# Altium PCB lte-router_V3.PcbDoc (part 1 of 2)
Units mm, origin at the board's own origin, x right, y up, seen from the top; angles counter-clockwise.
Board outline 80 x 50 mm, 4 copper layers (Top Layer, Inner Layer 2, Inner Layer 3, Bottom Layer), stack 1.443 mm thick; 105 components, 103 nets, 432 pads, 350 vias.
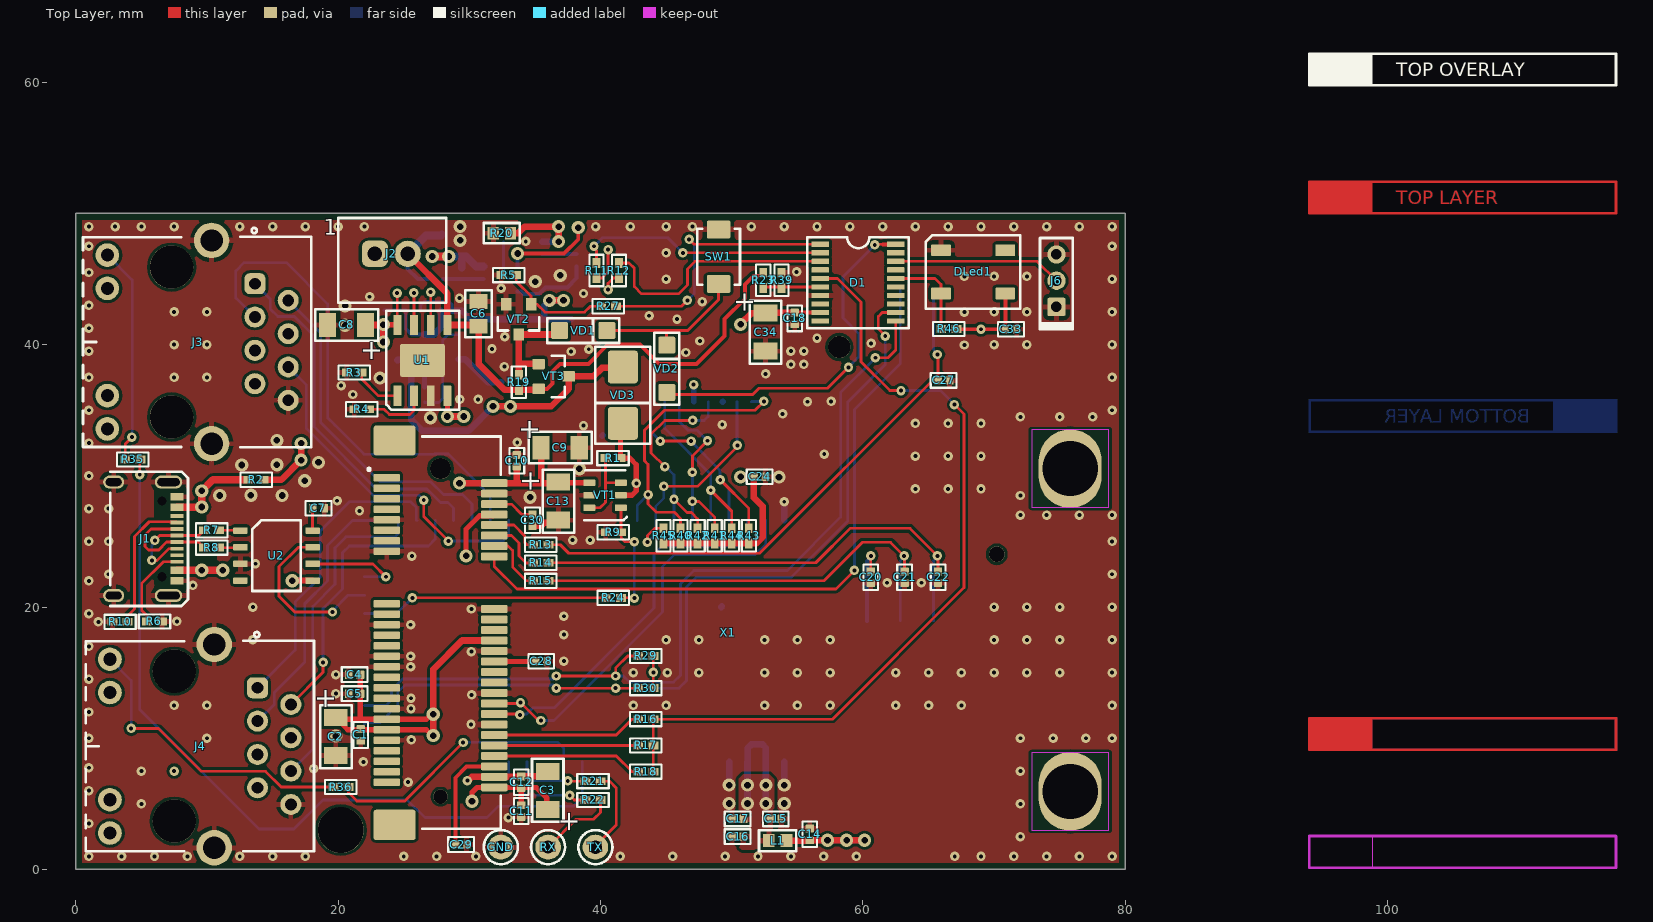
[diagram p0: Top Layer view]
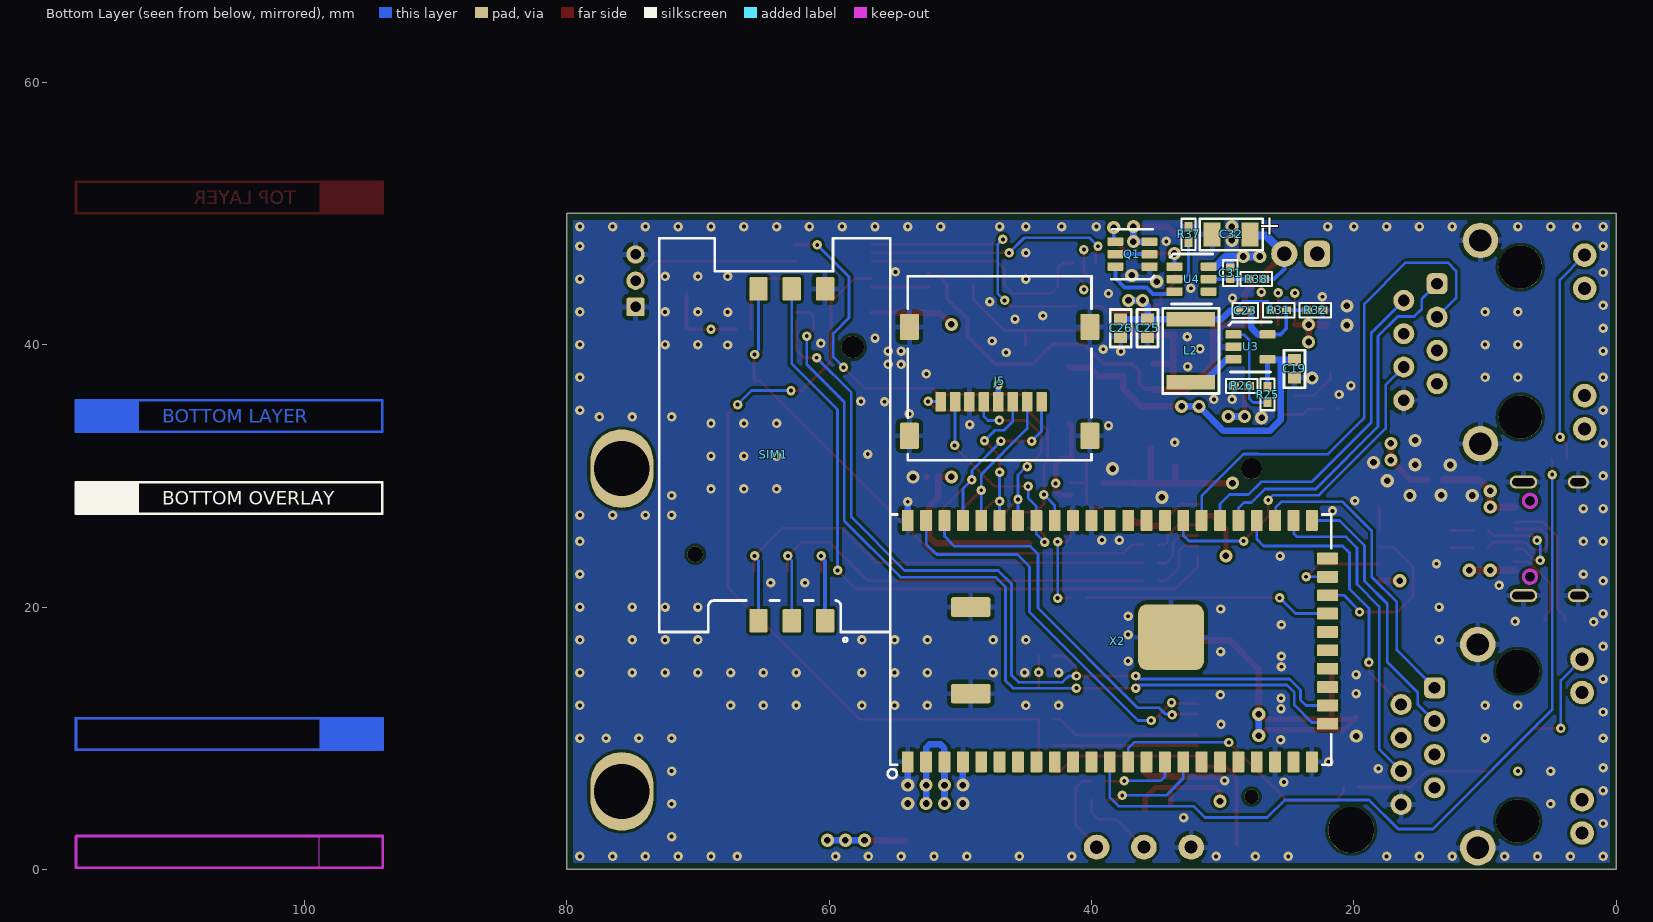
[diagram p1: Bottom Layer view, seen from below]
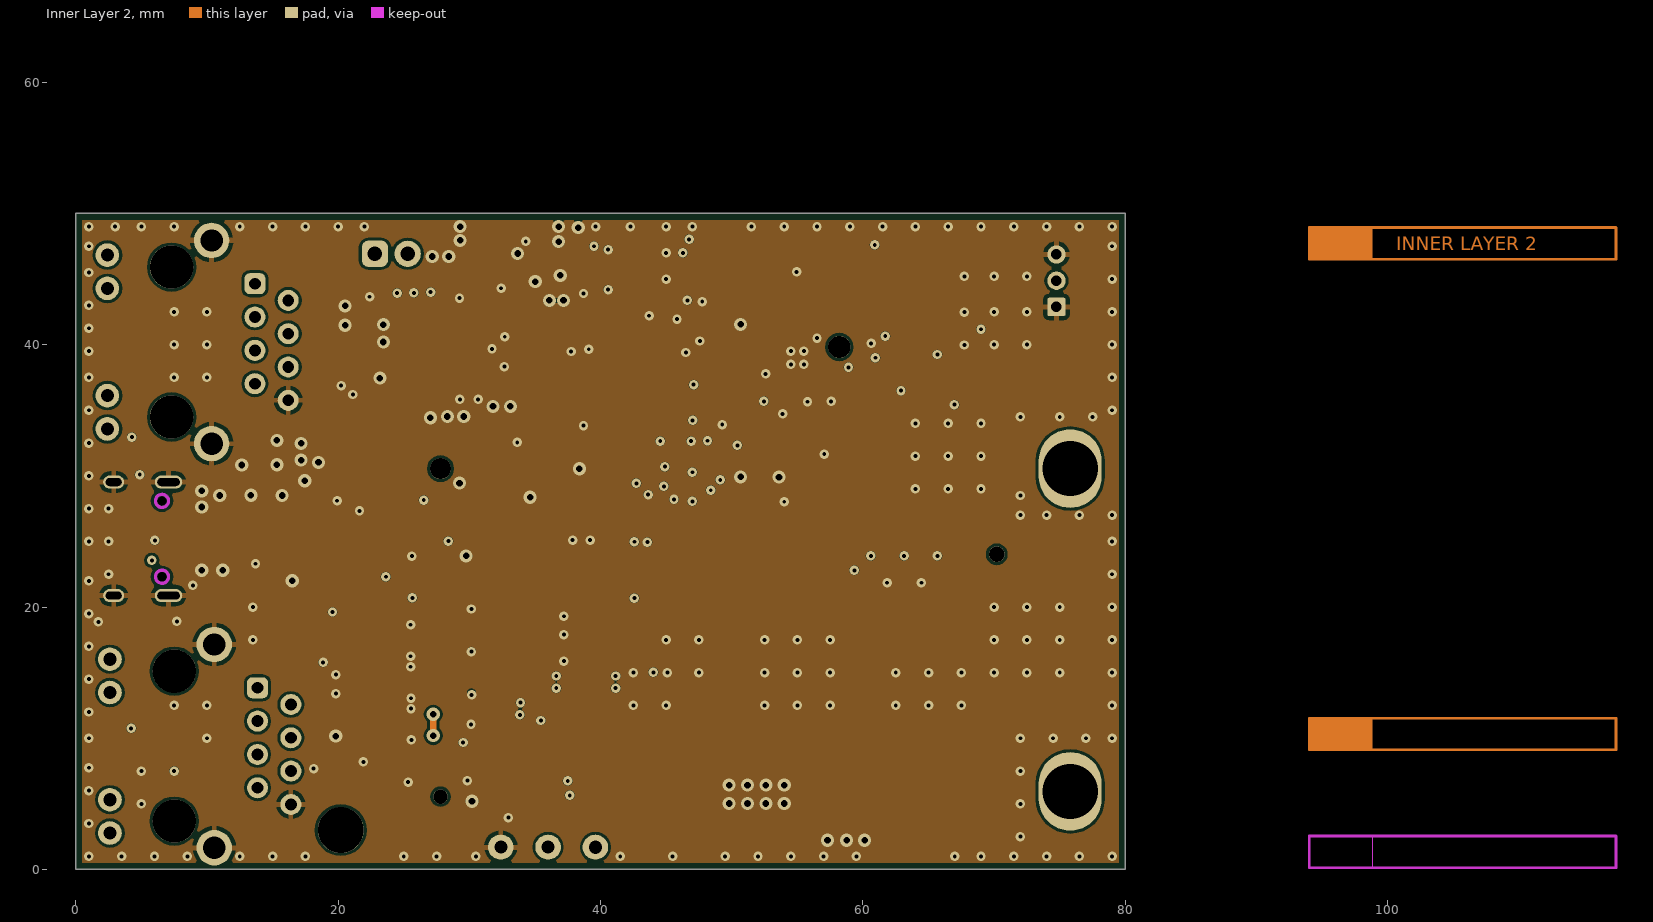
[diagram p2: Inner Layer 2]
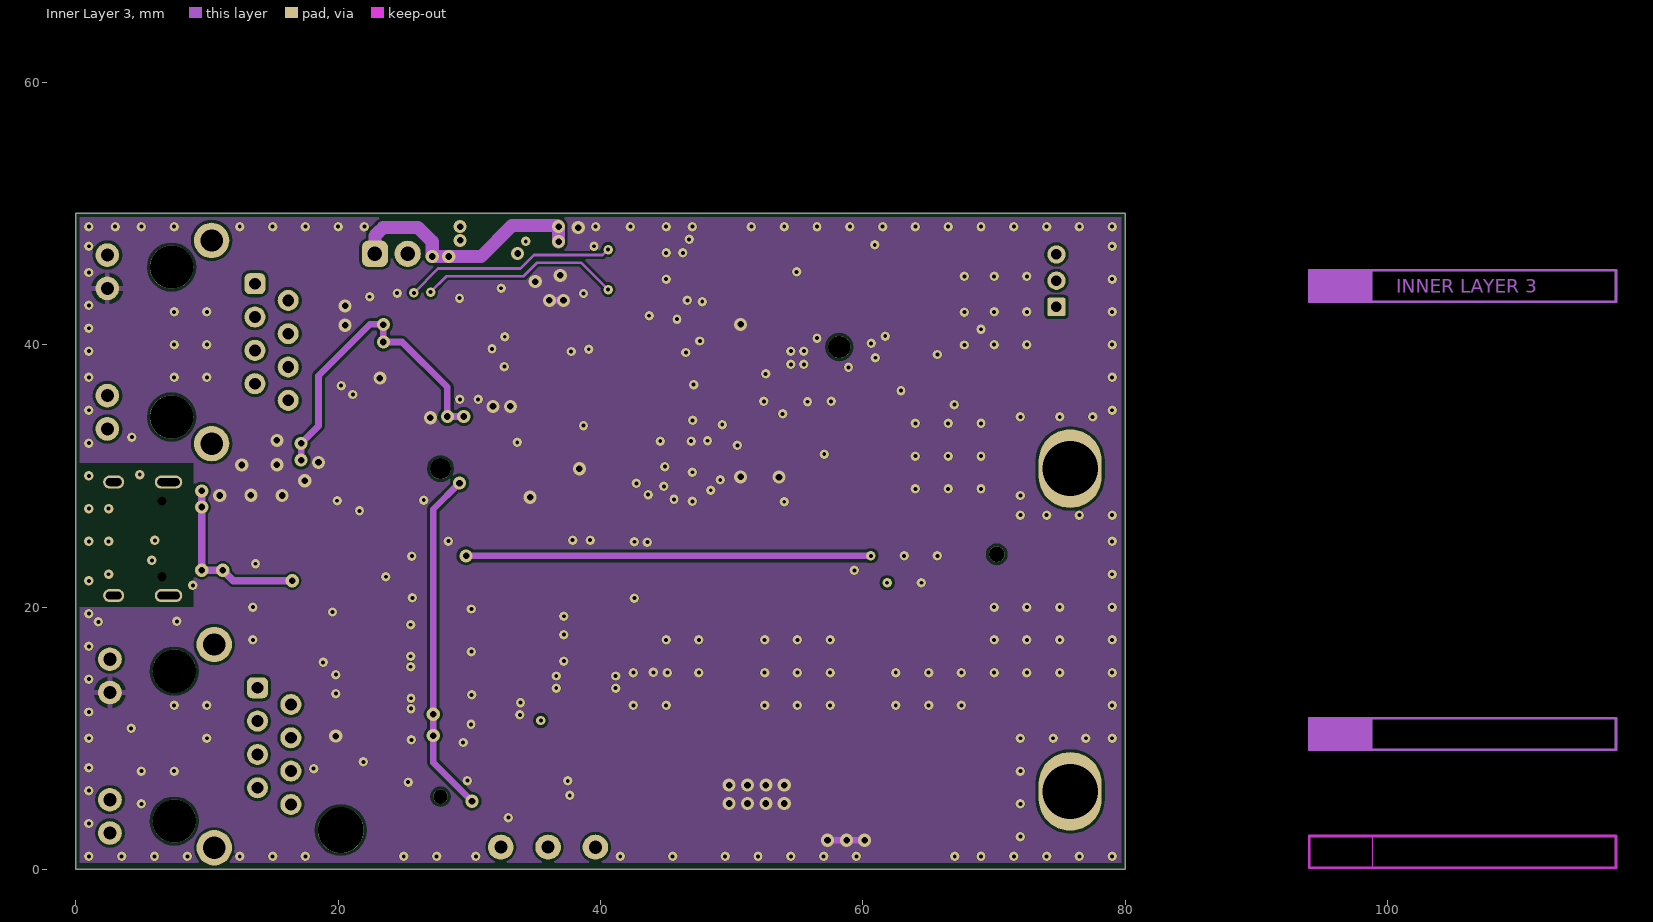
[diagram p3: Inner Layer 3]

## Layer stack, top to bottom
Top Solder: solder mask 0.0102, Solder Resist, Dk 3.5
Top Layer: signal copper 0.0356
Dielectric1: core 0.55, FR-4, Dk 4.2
Inner Layer 2: signal copper 0.036
Dielectric 4: prepreg 0.2, Dk 4.2
Inner Layer 3: signal copper 0.0356
Dielectric2: core 0.55, FR-4, Dk 4.2
Bottom Layer: signal copper 0.0356
Bottom Solder: solder mask 0.0102, Solder Resist, Dk 3.5

## Board outline
0,0 80,0 80,50 0,50

## Design rules (kind name [scope] priority, off if disabled: settings)
BoardOutlineClearance [not WithinRoom('Layers_Room')] p1: gap=0.3 ignorepadtopadclearanceinfootprint=FALSE
Clearance Pad_Via [IsVia vs IsPad] p1: gap=0.25 ignorepadtopadclearanceinfootprint=FALSE except(0: Arc-Hole Track-Hole SMDPad-Hole THPad-Hole Via-Hole Fill-Hole Poly-Hole Region-Hole Text-Hole)
Clearance MH [HasFootprint('HOLE3_D3.5_NM') vs not (OnLayer('Keep-Out Layer') or (InPadClass('Battery Pads')))] p2: gap=5.5 ignorepadtopadclearanceinfootprint=FALSE except(0: Arc-Hole Track-Hole SMDPad-Hole THPad-Hole Via-Hole Fill-Hole Poly-Hole Region-Hole Text-Hole)
Clearance "Keepout Layer" [(OnLayer('Keep-Out Layer')) and not WithinRoom('Room_sign')] p3 off: gap=2.2 ignorepadtopadclearanceinfootprint=FALSE except(0: Arc-Hole Track-Hole SMDPad-Hole THPad-Hole Via-Hole Fill-Hole Poly-Hole Region-Hole Text-Hole)
Clearance Clearance_Q8 [InComponent('Q8')] p4 off: gap=0.3 ignorepadtopadclearanceinfootprint=FALSE except(0: Arc-Hole Track-Hole SMDPad-Hole THPad-Hole Via-Hole Fill-Hole Poly-Hole Region-Hole Text-Hole)
Clearance MH_0.5MM [InPadClass('MH CLR 0.5') vs not (OnLayer('Keep-Out Layer'))] p5 off: gap=0.5 ignorepadtopadclearanceinfootprint=FALSE except(0: Arc-Hole Track-Hole SMDPad-Hole THPad-Hole Via-Hole Fill-Hole Poly-Hole Region-Hole Text-Hole)
Clearance SMD-->TH_Conn [InComponent('J1')] p6: gap=0 ignorepadtopadclearanceinfootprint=FALSE
Clearance SMD-->TH [IsSMTPin vs IsPadHoleValid] p7: gap=1 ignorepadtopadclearanceinfootprint=FALSE except(0: Arc-Hole Track-Hole SMDPad-Hole THPad-Hole Via-Hole Fill-Hole Poly-Hole Region-Hole Text-Hole)
Clearance DVC_A_Reinforced [InNetClass('DVC_A') or InNetClass('UT_1_Nets') or InNetClass('UT_2_Nets') or InNetClass('UT_3_Nets') or InNetClass('U_FS11_Nets') or InNetClass('U_FS12_Nets') or   InNetClass('U_PowerLV_Nets') or InNetClass('U_Esp32_Nets') vs not ( InNetClass('DVC_A') or InNetClass('UT_1_Nets') or InNetClass('UT_2_Nets') or InNetClass('UT_3_Nets') or InNetClass('U_FS11_Nets') or InNetClass('U_FS12_Nets') or   InNetClass('U_PowerLV_Nets')   or InNetClass('U_Esp32_Nets') or OnLayer('Keep-Out Layer') or InPadClass('Battery Pads'))] p8 off: gap=5.5 ignorepadtopadclearanceinfootprint=FALSE except(0: Arc-Hole Track-Hole SMDPad-Hole THPad-Hole Via-Hole Fill-Hole Poly-Hole Region-Hole Text-Hole)
Clearance Functional_600_1 [InNetClass('V614DC_1') vs not (( InNetClass('V614DC_1')  or InNetClass('T1_Hi') or HasFootprint('DPAK228P991X239-3N') )  or HasFootprint('TRANS ECO2425SLD'))] p9 off: gap=3.2 ignorepadtopadclearanceinfootprint=FALSE except(0: Arc-Hole Track-Hole SMDPad-Hole THPad-Hole Via-Hole Fill-Hole Poly-Hole Region-Hole Text-Hole)
Clearance FUNCTIOAL_250ac_L_1 [InNetClass('V220AC_L_1') vs not ( InNetClass('V220AC_L_1')   or InNetClass('J_NC') )] p10 off: gap=1 ignorepadtopadclearanceinfootprint=FALSE except(0: Arc-Hole Track-Hole SMDPad-Hole THPad-Hole Via-Hole Fill-Hole Poly-Hole Region-Hole Text-Hole)
Clearance [not WithinRoom('Layers_Room')] p11: gap=0.21 ignorepadtopadclearanceinfootprint=FALSE
ComponentClearance [not InComponent('GND') vs InComponent('X1')] p1: gap=0.8 collisioncheckmode=3 verticalgap=0.254 showdistances=FALSE
Height [All] p1: minheight=0 maxheight=35 prefheight=12.7
HoleSize [All] p1: absolutevalues=TRUE maxlimit=6 minlimit=0.3 maxpercent=80.000 minpercent=20.000
HoleToHoleClearance [All] p1: gap=0.45 allowstackedmicrovias=TRUE
MatchedLengths MatchedLengths_USB20 [InDifferentialPairClass('DP_20')] p1: tolerance=1.25 checknetsindiffpair=TRUE checkdiffpairvsdiffpair=FALSE checkxsignals=FALSE checkothers=FALSE usedelayunits=FALSE
MatchedLengths MatchedLengthsUSBSS [InDifferentialPairClass('DP_30')] p2: tolerance=0.12 checknetsindiffpair=TRUE checkdiffpairvsdiffpair=FALSE checkxsignals=FALSE checkothers=FALSE usedelayunits=FALSE
MinimumSolderMaskSliver [All] p1: minsoldermaskwidth=0.102
PolygonConnect PolygonConnect_Dirrect [InComponent('U1')] p1: connectstyle=Direct reliefconductorwidth=0.4 reliefentries=4 polygonreliefangle="90 Angle" airgapwidth=0.3
PolygonConnect [All] p2: thpad.connectstyle=Relief thpad.reliefconductorwidth=0.4 thpad.reliefentries=4 thpad.polygonreliefangle="90 Angle" thpad.airgapwidth=0.3 smdpad.connectstyle=Relief smdpad.reliefconductorwidth=0.4 smdpad.reliefentries=4 smdpad.polygonreliefangle="90 Angle" smdpad.airgapwidth=0.3 via.connectstyle=Direct via.reliefconductorwidth=0.4 via.reliefentries=4 via.polygonreliefangle="90 Angle" via.airgapwidth=0.3
RoomDefinition Layers_Room [False] p1: confinementstyle=ConfineIn formatcopy=TRUE lockcomponents=FALSE outline 87.85,70.65 123.75,70.65 123.75,-5.725 87.85,-5.725
RoutingVias [All] p1: holewidth=0.3 width=0.72 viastyle="Through Hole" minholewidth=0.3 minwidth=0.72 maxholewidth=0.8 maxwidth=1.5
SilkToSilkClearance [All] p1: silktosilkclearance=0
SilkToSolderMaskClearance SilkToSolderMaskClearance_0402 [IsPad] p1: minsilkscreentomaskgap=0.16 clearancetoexposedcopper=TRUE
SilkToSolderMaskClearance [IsPad] p2: minsilkscreentomaskgap=0.2 clearancetoexposedcopper=TRUE
SolderMaskExpansion SolderMaskExpansion_Via_NoMask [IsVia] p1: expansion=-5
SolderMaskExpansion [All] p2: expansion=0.025
UnRoutedNet [All] p1: checkbadconnections=TRUE
Width [not WithinRoom('Layers_Room')] p1: maxlimit=5 minlimit=0.21 preferedwidth=0.4
22 further rules are at their usual default settings.

## Components (designator, comment, footprint, x,y, rotation, side; value= is the part's Value field where it differs from the comment)
C1 "Cap1" C_0402 21.725,10.25 r270 top value=10nF
C2 "CapPOL1" TANT_CAP_A 19.825,10.125 r270 top value=10uF
C3 "CapPOL1" TANT_CAP_A 35.975,6.025 r90 top value=10uF
C4 "Cap1" C_0402 21.25,14.85 r0 top value=10pF
C5 "Cap1" C_0402 21.25,13.4 r0 top value=10pF
C6 "Cap1" C_0805 30.7,42.35 r90 top value=10uF
C7 "Cap1" C_0402 18.5,27.525 r0 top value=100nF
C8 "CapPOL1" TANT_CAP_A 20.65,41.5 r180 top value=10uF
C9 "CapPOL1" TANT_CAP_A 36.925,32.15 r0 top value=10uF
C10 "Cap1" C_0402 33.625,31.15 r270 top value=10nF
C11 "Cap1" C_0402 33.95,4.45 r90 top value=10pF
C12 "Cap1" C_0402 33.95,6.65 r270 top value=10pF
C13 "CapPOL1" TANT_CAP_A 36.79,28.07 r270 top value=10uF
C14 "Cap1" C_0402 55.95,2.675 r270 top value=10uF
C15 "Cap1" C_0402 53.35,3.85 r180 top value=10uF
C16 "Cap1" C_0402 50.45,2.5 r0 top value=10nF
C17 "Cap1" C_0402 50.45,3.85 r0 top value=10nF
C18 "Cap1" C_0402 54.8,42 r270 top value=100nF
C19 "Cap1" C_0603 24.525,38.15 r90 bottom value=2.2uF
C20 "Cap1" C_0402 60.6,22.275 r90 top value=10pF
C21 "Cap1" C_0402 63.175,22.275 r90 top value=10pF
C22 "Cap1" C_0402 65.725,22.275 r90 top value=10pF
C23 "Cap1" C_0402 28.275,42.6 r0 bottom value=47pF
C24 "Cap1" C_0402 52.125,29.925 r180 top value=10nF
C25 "Cap1" C_0603 35.725,41.25 r90 bottom value=2.2uF
C26 "Cap1" C_0603 37.775,41.25 r90 bottom value=2.2uF
C27 "Cap1" C_0402 66.15,37.275 r180 top value=10pF
C28 "Cap1" C_0402 35.48,15.87 r180 top value=100nF
C29 "Cap1" C_0402 29.37,1.9 r0 top value=100nF
C30 "Cap1" C_0402 34.81,26.62 r270 top value=100nF
C31 "Cap1" C_0402 29.425,45.45 r270 bottom value=100nF
C32 "CapPOL1" TANT_CAP_A 29.35,48.4 r0 bottom value=10uF
C33 "Cap1" C_0402 71.285,41.175 r180 top value=100nF
C34 "CapPOL1" TANT_CAP_A 52.575,40.95 r270 top value=10uF
D1 "CH32V003F4P6_1" TSSOP20 59.625,44.725 r270 top value=CH32V003F4P6
DLed1 "D_RGB_LED1" SMD5050 68.4,45.55 r180 top value=WS2812B-B/W
GND "GND" KP_c2_h1#1 32.4,1.7 r0 top value=KP_c2_h1
J1 "USB-TYPE-C-12pin_1" USB-31CW04-01(R)N 5.3,25.2 r90 top value=TYPE-C-31-M-12
J2 "Conn2" B2B-XH-A 24.05,46.925 r180 top value=B2B-XH-A
J3 "HR911105A_1" HR911105A 9.3,40.2 r90 top locked value=HR911105A
J4 "HR911105A_1" HR911105A 9.5,9.4 r90 top locked value=HR911105A
J5 "SD-CARD-12pin_1" TF-014-H16 47,37.2 r180 bottom value=TF-014-H16
J6 "Conn3" PBS2-3 74.75,44.875 r90 top value=PBS2-3
L1 "Inductor1" L_0603 53.5,2.2 r180 top value=BLM18
L2 "Inductor1" SMD4x4 32.425,39.525 r90 bottom value=1.5uH
Q1 "FS8205A_1" SOT-23-6 36.875,46.9 r0 bottom value=8205
R1 "Res1" R_0402 40.95,31.35 r0 top value=10K
R2 "Res1" R_0402 13.75,29.7 r0 top value=0R
R3 "Res1" R_0402 21.225,37.875 r0 top value=0R
R4 "Res1" R_0402 21.8,35.075 r0 top value=1K5
R5 "Res1" R_0402 33,45.3 r0 top value=100K
R6 "Res1" R_0402 6,18.9 r180 top value=5K1
R7 "Res1" R_0402 10.35,25.85 r180 top value=22R
R8 "Res1" R_0402 10.35,24.525 r180 top value=22R
R9 "Res1" R_0402 40.975,25.7 r180 top value=10K
R10 "Res1" R_0402 3.375,18.875 r180 top value=5K1
R11 "Res1" R_0402 39.7,45.65 r90 top value=47R
R12 "Res1" R_0402 41.4,45.65 r90 top value=47R
R13 "Res1" R_0402 35.45,24.75 r0 top value=47R
R14 "Res1" R_0402 35.45,23.375 r0 top value=47R
R15 "Res1" R_0402 35.45,22 r0 top value=47R
R16 "Res1" R_0402 43.45,11.45 r0 top value=47R
R17 "Res1" R_0402 43.45,9.45 r0 top value=47R
R18 "Res1" R_0402 43.45,7.45 r0 top value=47R
R19 "Res1" R_0402 33.775,37.125 r270 top value=100K
R20 "Res1" R_0603 32.475,48.5 r0 top value=0R
R21 "Res1" R_0402 39.425,6.725 r180 top value=0R
R22 "Res1" R_0402 39.425,5.3 r180 top value=0R
R23 "Res1" R_0402 52.4,44.9 r90 top value=470K
R24 "Res1" R_0402 40.975,20.7 r180 top value=0R
R25 "Res1" R_0402 26.575,36.2 r90 bottom value=100K
R26 "Res1" R_0402 28.55,36.85 r180 bottom value=100K
R27 "Res1" R_0402 40.6,42.925 r0 top value=4K7
R29 "Res1" R_0402 43.45,16.275 r180 top value=4K7
R30 "Res1" R_0402 43.45,13.815 r180 top value=4K7
R31 "Res1" R_0402 25.725,42.62 r0 bottom value=453K
R32 "Res1" R_0402 22.95,42.62 r0 bottom value=100K
R35 "Res1" R_0402 4.35,31.25 r0 top value=330R
R36 "Res1" R_0402 20.21,6.28 r0 top value=330R
R37 "Res1" R_0402 32.6,48.4 r270 bottom value=1K
R38 "Res1" R_0402 27.425,45 r180 bottom value=100R
R39 "Res1" R_0402 53.8,44.9 r270 top value=470K
R40 "Res1" R_0402 46.1,25.425 r270 top value=10K
R41 "Res1" R_0402 48.7,25.425 r270 top value=10K
R42 "Res1" R_0402 47.4,25.425 r270 top value=10K
R43 "Res1" R_0402 51.3,25.425 r270 top value=10K
R44 "Res1" R_0402 50,25.425 r270 top value=10K
R45 "Res1" R_0402 44.8,25.425 r270 top value=10K
R46 "Res1" R_0402 66.55,41.2 r0 top value=4K7
RX "RX" KP_c2_h1#1 36,1.7 r0 top value=KP_c2_h1
SIM1 "7111S2015X02LF" 7111S2015X02LF 64.2,31.6 r0 bottom
SW1 "SW1" TS1088AR02016 49,46.7 r270 top value=TS-1088
TX "TX" KP_c2_h1#2 39.609,1.7 r0 top value=KP_c2_h1
U1 "TP4056_1" ESOP-8 26.425,38.8 r90 top value=TP4056
U2 "CH340N_1" SOP-8 15.3,23.925 r0 top value=CH340N
U3 "SY8089_1" SOT-23-5 27.875,39.825 r180 bottom value=SY8089A
U4 "DW01A_2" SOT-23-6 32.37,45 r180 bottom value=DW01A
VD1 "D_Shottky1" SOD123 38.675,41.075 r180 top value=PMEG3010
VD2 "D_Shottky1" SOD123 45.048,38.158 r270 top value=PMEG3010
VD3 "D_Shottky1" SMB 41.7,36.15 r90 top value=SS26
VT1 "P-CH_N-CH" SOT-23-6L 40.35,28.525 r180 top value=AP2003
VT2 "N-CH_1" SOT-23-3#1 33.75,41.925 r270 top value=BSS138
VT3 "P-CH_1" SOT-23-3#2 36.425,37.575 r0 top value=AP2301B
X1 "1775838-2_1" 17758382 27.8,30.55 r270 top value=1775838-2
X2 "HLK-7688A_1" 7688A 38,17.4 r0 bottom value=HLK-7688A

## Footprints (in the part's own frame and the unit in brackets; to place one, negate y for a bottom-side part, rotate by r counter-clockwise, add the part's x,y. Pads: shape width x height; smd on the part's side, far side on the other; paste and mask are expansions set on the pad)
7111S2015X02LF [mm]
  rrect15% 1.4x1.8 smd: 1(-3.9,12.65) 2(-1.36,12.65) 3(1.18,12.65) 5(-3.9,-12.65) 6(-1.36,-12.65) 7(1.18,-12.65)
  round 1.2 hole 1.2 unplated: MH1(6,7.58)
  round 1.7 hole 1.7 unplated: MH2(-6,-8.22)
  silkscreen extent -8.86,-16.5 8.74,14.25, body extent -8.63,-16.22 8.57,13.28, height 2.59
7688A [mm]
  rrect15% 0.9x1.6 smd: 1(16,9.2) 2(14.6,9.2) 3(13.2,9.2) 4(11.8,9.2) 5(10.4,9.2) 6(9,9.2) 7(7.6,9.2) 8(6.2,9.2) 9(4.8,9.2) 10(3.4,9.2) 11(2,9.2) 12(0.6,9.2) 13(-0.8,9.2) 14(-2.2,9.2) 15(-3.6,9.2) 16(-5,9.2) 17(-6.4,9.2) 18(-7.8,9.2) 19(-9.2,9.2) 20(-10.6,9.2) 21(-12,9.2) 22(-13.4,9.2) 23(-14.8,9.2) 34(-14.8,-9.2) 35(-13.4,-9.2) 36(-12,-9.2) 37(-10.6,-9.2) 38(-9.2,-9.2) 39(-7.8,-9.2) 40(-6.4,-9.2) 41(-5,-9.2) 42(-3.6,-9.2) 43(-2.2,-9.2) 44(-0.8,-9.2) 45(0.6,-9.2) 46(2,-9.2) 47(3.4,-9.2) 48(4.8,-9.2) 49(6.2,-9.2) 50(7.6,-9.2) 51(9,-9.2) 52(10.4,-9.2) 53(11.8,-9.2) 54(13.2,-9.2) 55(14.6,-9.2) 56(16,-9.2)
  rrect15% 1.6x0.9 smd: 24(-16,6.3) 25(-16,4.9) 26(-16,3.5) 27(-16,2.1) 28(-16,0.7) 29(-16,-0.7) 30(-16,-2.1) 31(-16,-3.5) 32(-16,-4.9) 33(-16,-6.3)
  rrect20% 3x1.5 smd: 57(11.2,-2.6) 58(11.2,4)
  rrect25% 5x5 smd: 59(-4.066,-0.3)
  silkscreen extent -16.28,-9.65 17.52,10.45, body extent -16.11,-9.47 17.1,9.25, height 1.86
17758382 [mm]
  rrect25% 0.59x2 smd: 1(0.7,-4.1) 2(1.1,4.1) 3(1.5,-4.1) 4(1.9,4.1) 5(2.3,-4.1) 6(2.7,4.1) 7(3.1,-4.1) 8(3.5,4.1) 9(3.9,-4.1) 10(4.3,4.1) 11(4.7,-4.1) 12(5.1,4.1) 13(5.5,-4.1) 14(5.9,4.1) 15(6.3,-4.1) 16(6.7,4.1) 17(10.3,-4.1) 18(10.7,4.1) 19(11.1,-4.1) 20(11.5,4.1) 21(11.9,-4.1) 22(12.3,4.1) 23(12.7,-4.1) 24(13.1,4.1) 25(13.5,-4.1) 26(13.9,4.1) 27(14.3,-4.1) 28(14.7,4.1) 29(15.1,-4.1) 30(15.5,4.1) 31(15.9,-4.1) 32(16.3,4.1) 33(16.7,-4.1) 34(17.1,4.1) 35(17.5,-4.1) 36(17.9,4.1) 37(18.3,-4.1) 38(18.7,4.1) 39(19.1,-4.1) 40(19.5,4.1) 41(19.9,-4.1) 42(20.3,4.1) 43(20.7,-4.1) 44(21.1,4.1) 45(21.5,-4.1) 46(21.9,4.1) 47(22.3,-4.1) 48(22.7,4.1) 49(23.1,-4.1) 50(23.5,4.1) 51(23.9,-4.1) 52(24.3,4.1)
  rrect20% 2.3x3.2 smd: 53(-2.15,-3.5)
  rrect15% 2.3x3.2 smd: 54(27.15,-3.5)
  round 1.6 hole 1.6 unplated: 55(0,0)
  round 1.1 hole 1.1 unplated: 56(25,0)
  oval 6x4.8 hole 4.2: 57(0,48) 58(24.6,48)
  Top Layer keep-out region: -2.95,45.05 2.95,45.05 2.95,50.95 -2.95,50.95
  Top Layer keep-out region: 21.65,45.05 27.55,45.05 27.55,50.95 21.65,50.95
  silkscreen extent -2.45,-5.55 27.45,4.6, body extent -2.45,-4.79 27.45,4.29, height 5.68
B2B-XH-A [mm]
  rrect50% 2x2 hole 1.1 paste-2539.97 mask+0: 1(1.25,0)
  round 2 hole 1.1 paste-2539.97 mask+0: 2(-1.25,0)
  silkscreen extent -4.2,-2.73 4.05,3.72, body extent -3.77,-2.4 3.63,3.35, height 7
C_0402 [mm] "Chip Capacitor, 2-Leads, Body 1.02x0.51mm, IPC Medium Density"
  rrect15% 0.6x0.64 smd: 1(-0.44,0) 2(0.44,0)
  silkscreen extent -0.98,-0.56 0.98,0.56, body extent -0.5,-0.26 0.5,0.26, height 0.52
C_0603 [mm] "Chip Capacitor, 2-Leads, Body 1.60x0.80mm, IPC Medium Density"
  rect 0.9x1 smd: 1(-0.675,0) 2(0.675,0)
  silkscreen extent -1.43,-0.8 1.43,0.8, body extent -0.8,-0.41 0.8,0.41, height 0.82
C_0805 [mm] "Chip Capacitor, 2-Leads, Body 2.00x1.20mm, IPC Medium Density"
  rect 1.12x1.4 smd: 1(-0.94,0) 2(0.94,0)
  silkscreen extent -1.8,-1 1.8,1, body extent -1,-0.64 1,0.64, height 1.26
ESOP-8 [mm] "SOT23, 3-Leads, Body 2.90x2.40mm, Pitch 0.95mm, IPC Medium Density"
  rrect10% 1.55x0.6 smd: 1(-2.7,1.905) 2(-2.7,0.635) 3(-2.7,-0.635) 4(-2.7,-1.905) 5(2.7,-1.905) 6(2.7,-0.635) 7(2.7,0.635) 8(2.7,1.905)
  rrect10% 2.5x3.4 smd: 9(0,0)
  silkscreen extent -3.77,-2.8 3.77,2.75, body extent -3.1,-2.49 3.1,2.49, height 1.68
HR911105A [mm]
  rrect50% 1.6x1.6 hole 0.9: 1(4.445,-4.355)
  round 1.6 hole 0.9: 2(3.175,-6.895) 3(1.905,-4.355) 4(0.635,-6.895) 5(-0.635,-4.355) 6(-1.905,-6.895) 7(-3.175,-4.355) 8(-4.445,-6.895)
  round 1.8 hole 1: 9(6.625,6.895) 10(4.085,6.895) 11(-4.085,6.895) 12(-6.625,6.895)
  round 2.7 hole 1.7: MH1(7.745,-1.055) MH2(-7.745,-1.055)
  round 3.3 hole 3.3 unplated: MH3(5.715,1.995) MH4(-5.715,1.995)
  silkscreen extent -8.02,-8.65 8.7,8.75, body extent -7.93,-8.7 7.95,12.7, height 13.6
KP_c2_h1#1 [mm] "SOT23, 3-Leads, Body 2.90x2.40mm, Pitch 0.95mm, IPC Medium Density"
  oval 1.95x1.9 hole 1: 1(0,0)
  silkscreen extent -1.3,-1.3 1.3,1.3
KP_c2_h1#2 [mm] "SOT23, 3-Leads, Body 2.90x2.40mm, Pitch 0.95mm, IPC Medium Density"
  oval 1.95x1.9 hole 1: 1(0,-0.005)
  silkscreen extent -1.3,-1.3 1.3,1.3
L_0603 [mm] "Chip Inductor, 2-Leads, Body 1.60x0.80mm, IPC Medium Density"
  rect 0.9x1 smd: 1(-0.675,0) 2(0.675,0)
  silkscreen extent -1.43,-0.8 1.43,0.8, body extent -0.88,-0.47 0.88,0.47, height 0.94
PBS2-3 [mm]
  rrect20% 1.4x1.4 hole 0.8: 1(-2,0)
  round 1.4 hole 0.8: 2(0,0) 3(2,0)
  silkscreen extent -3.7,-1.25 3.25,1.25, body extent -3,-1 3,1, height 4.35
R_0402 [mm] "Chip Resistor, 2-Leads, Body 1.0x0.5mm, IPC Medium Density"
  rect 0.75x0.6 smd: 1(-0.575,0) 2(0.575,0)
  silkscreen extent -1.2,-0.54 1.2,0.54, body extent -0.5,-0.25 0.5,0.25, height 0.35
R_0603 [mm] "Chip Resistor, 2-Leads, Body 1.60x0.80mm, IPC Medium Density"
  rect 0.85x0.95 smd: 1(-0.65,0) 2(0.65,0)
  silkscreen extent -1.38,-0.77 1.38,0.77, body extent -0.8,-0.4 0.8,0.4, height 0.45
SMB [mm]
  rrect20% 2.5x2.3 smd: 1(-2.15,0) 2(2.15,0)
  silkscreen extent -3.7,-2.1 3.7,2.1, body extent -2.79,-1.97 2.79,1.97, height 2.49
SMD4x4 [mm]
  rect 1.1x3.7 smd: 1(-2.402,0) 2(2.402,0)
  silkscreen extent -3.25,-2.15 3.25,2.15, body extent -2.2,-2 2.2,2, height 1.8
SMD5050 [mm] "SOT23, 3-Leads, Body 2.90x2.40mm, Pitch 0.95mm, IPC Medium Density"
  rrect15% 1.5x0.9 smd: 1(-2.45,1.65) 2(-2.45,-1.65) 3(2.45,-1.65) 4(2.45,1.65)
  silkscreen extent -3.6,-2.8 3.6,2.8, body extent -2.7,-2.5 2.7,2.5, height 1.55
SOD123 [mm]
  rrect20% 1.3x1.3 smd: 1(-1.8,0) 2(1.8,0)
  silkscreen extent -2.75,-0.95 2.75,0.95, body extent -1.86,-0.77 1.86,0.78, height 1.35
SOP-8 [mm]
  rrect25% 1.1x0.5 smd: 1(-2.75,1.905) 2(-2.75,0.635) 3(-2.75,-0.635) 4(-2.75,-1.905) 5(2.75,-1.905) 6(2.75,-0.635) 7(2.75,0.635) 8(2.75,1.905)
  silkscreen extent -1.85,-2.7 1.85,2.7, body extent -3.11,-2.5 3.11,2.5, height 1.87
SOT-23-3#1 [mm] "SOT23, 3-Leads, Body 2.90x2.40mm, Pitch 0.95mm, IPC Medium Density"
  rect 0.95x0.8 smd: 1(-1.15,0.95) 2(-1.15,-0.95) 3(1.15,0)
  silkscreen extent -0.15,-1.58 0.85,1.58, body extent -1.41,-1.45 1.41,1.45, height 1.5
SOT-23-3#2 [mm] "SOT23, 3-Leads, Body 2.90x2.40mm, Pitch 0.95mm, IPC Medium Density"
  rrect15% 0.95x0.8 smd: 1(-1.15,0.95) 2(-1.15,-0.95) 3(1.15,0)
  silkscreen extent -0.15,-1.58 0.85,1.58, body extent -1.41,-1.45 1.41,1.45, height 1.5
SOT-23-5 [mm]
  rrect20% 1.2x0.65 smd: 1(-1.3,0.95) 2(-1.3,0) 3(-1.3,-0.95) 4(1.3,-0.95) 5(1.3,0.95)
  silkscreen extent -1.65,-1.91 1.6,1.91, body extent -1.5,-1.55 1.5,1.55, height 1.45
SOT-23-6 [mm]
  rrect20% 1.2x0.65 smd: 1(-1.3,0.95) 2(-1.3,0) 3(-1.3,-0.95) 4(1.3,-0.95) 5(1.3,0) 6(1.3,0.95)
  silkscreen extent -1.65,-1.91 1.6,1.91, body extent -1.4,-1.45 1.4,1.45, height 1.2
SOT-23-6L [mm]
  rrect20% 0.9x0.5 smd: 1(-1.2,0.95) 2(-1.2,0) 3(-1.2,-0.95) 4(1.2,-0.95) 5(1.2,0) 6(1.2,0.95)
  silkscreen extent -1.65,-1.91 1.6,1.91, body extent -1.37,-1.49 1.37,1.49, height 1.15
TANT_CAP_A [mm] "Chip Capacitor, 2-Leads, Body 3.25x1.60mm, IPC Medium Density"
  rect 1.3x1.8 smd: 1(-1.45,0) 2(1.45,0)
  silkscreen extent -2.4,-1.2 2.4,1.2, body extent -1.7,-0.8 1.7,0.8, height 1.85
TF-014-H16 [mm]
  rrect15% 0.8x1.5 smd: 1(3.2,-1.55) 2(2.1,-1.55) 3(1,-1.55) 4(-0.1,-1.55) 5(-1.2,-1.55) 6(-2.3,-1.55) 7(-3.4,-1.55) 8(-4.5,-1.55)
  rrect15% 1.45x2 smd: 9(-6.875,-4.15) 10(-6.875,4.15) 11(6.875,4.15) 12(6.875,-4.15)
  silkscreen extent -7,-6 7,8, body extent -6.82,-5.7 6.68,7.8, height 2
TS1088AR02016 [mm]
  rrect15% 1.35x1.8 smd: 1(-2.075,0) 2(2.075,0)
  silkscreen extent -2.13,-1.63 2.13,1.63, body extent -2.5,-1.5 2.5,1.5, height 1.93
TSSOP20 [mm]
  rrect20% 0.4x1.35 smd mask+0.05: 1(-2.925,-2.875) 2(-2.275,-2.875) 3(-1.625,-2.875) 4(-0.975,-2.875) 5(-0.325,-2.875) 6(0.325,-2.875) 7(0.975,-2.875) 8(1.625,-2.875) 9(2.275,-2.875) 10(2.925,-2.875) 11(2.925,2.875) 12(2.275,2.875) 13(1.625,2.875) 14(0.975,2.875) 15(0.325,2.875) 16(-0.325,2.875) 17(-0.975,2.875) 18(-1.625,2.875) 19(-2.275,2.875) 20(-2.925,2.875)
  silkscreen extent -3.47,-3.88 3.47,3.87, body extent -3.3,-3.3 3.3,3.3, height 1.2
USB-31CW04-01(R)N [mm]
  rect 0.59x1 smd: 1(3.2,-2.41) 2(2.4,-2.41) 11(-2.4,-2.41) 12(-3.2,-2.41)
  rect 0.29x1 smd: 3(1.75,-2.41) 4(1.25,-2.41) 5(0.75,-2.41) 6(0.25,-2.41) 7(-0.25,-2.41) 8(-0.75,-2.41) 9(-1.25,-2.41) 10(-1.75,-2.41)
  round 0.25 hole 0.7 unplated: CM(-2.89,-1.27) CM(2.89,-1.27)
  oval 1x2.1 hole 0.6 slot 1.7 at 90 deg: SH(-4.325,-1.77) SH(4.325,-1.77)
  oval 1x1.6 hole 0.6 slot 1.2 at 90 deg: SH(-4.325,2.41) SH(4.325,2.41)
  silkscreen extent -5.13,-3.25 5.13,2.68, body extent -4.48,-2.74 4.47,5.01, height 3.24

## Part data
C1 C10 C16 C17 C24: library part Cap_14, "CAP CER 10nF ±10% 50V X7R 0402", Manufacturer="Samsung Electro-Mechanics", Manufacturer Part Number=CL05B103KB5NNNC, Operating Temperature="-55°C ~ 125°C", Part Number="CAP 0402 X7R 10nF 50V", Supplier Part Number 1=1276-1028-1-ND, Date Of Revision=22-Nov-24, Item=Cap_14, Packaging="Cut Tape (CT)", Supplier 1=DiGiKey, Supplier 2=JLCPCB, Supplier 3=Kosmodrom, Supplier Part Number 2=C15195, Supplier Part Number 3=00-00073522, Supplier Unit Price 1=0.08, Supplier Unit Price 100=0.004, Type=SMD
C2 C3 C8 C9 C13 C32 C34: library part Cap_50, "CAP TANT 10UF 20% 10V 1206", Manufacturer="KYOCERA AVX", Manufacturer Part Number=TAJA106M010RNJ, Operating Temperature="-55°C ~ 125°C", Part Number="CAP TANT 10mkF 10V \"A\"", Supplier Part Number 1=478-1657-1-ND, Date Of Revision=05-Dec-24, Item=Cap_50, Packaging="Cut Tape (CT)", Supplier 1=DiGiKey, Supplier 2=JLCPCB, Supplier 3=IMRAD, Supplier Part Number 2=C92127, Supplier Part Number 3=369662, Supplier Unit Price 1=0.37, Supplier Unit Price 100=0.1386, Type=SMD
C4 C5 C11 C12 C20 C21 C22 C27: library part Cap_1, "CAP CER 10PF ±5% 50V C0G/NP0 0402", Manufacturer="Murata Electronics", Manufacturer Part Number=GRM1555C1H100JA01D, Operating Temperature="-55°C ~ 125°C", Part Number="CAP 0402 NP0 10pF 50V", Supplier Part Number 1=490-5921-1-ND, Date Of Revision=22-Nov-24, Item=Cap_1, Packaging="Cut Tape (CT)", Supplier 1=DiGiKey, Supplier 2=JLCPCB, Supplier 3=Kosmodrom, Supplier Part Number 2=C76946, Supplier Part Number 3=00-00034318, Supplier Unit Price 1=0.08, Supplier Unit Price 100=0.0072, Type=SMD
C6: library part Cap_41, "CAP CER 10UF ±10% 16V X7R 0805", Manufacturer="Samsung Electro-Mechanics", Manufacturer Part Number=CL21B106KOQNNNE, Operating Temperature="-55°C ~ 125°C", Part Number="CAP 0805 X7R 10mkF 16V", Supplier Part Number 1=1276-2872-1-ND, Date Of Revision=01-Aug-24, Item=Cap_41, Packaging="Cut Tape (CT)", Supplier 1=DiGiKey, Supplier 2=JLCPCB, Supplier 3=Kosmodrom, Supplier Part Number 2=C95841, Supplier Part Number 3=00-00073508, Supplier Unit Price 1=0.26, Supplier Unit Price 100=0.0841, Type=SMD
C7 C28 C29 C30 C31: library part Cap_18, "CAP CER 0.1UF ±10% 50V X7R 0402", Manufacturer="Murata Electronics", Manufacturer Part Number=GRM155R71H104KE14J, Operating Temperature="-55°C ~ 125°C", Part Number="CAP 0402 X7R 100nF 50V", Supplier Part Number 1=490-13342-1-ND, Date Of Revision=24-Nov-24, Item=Cap_18, Packaging="Cut Tape (CT)", Supplier 1=DiGiKey, Supplier 2=JLCPCB, Supplier 3=Kosmodrom, Supplier Part Number 2=C2649519, Supplier Part Number 3=00-00069281, Supplier Unit Price 1=0.08, Supplier Unit Price 100=0.0072, Type=SMD
C14 C15: library part Cap_28, "CAP CER 10UF ±10% 10V X6S 0603", Manufacturer="Murata Electronics", Manufacturer Part Number=GRM188C81A106KA73D, Operating Temperature="-55°C ~ 105°C", Part Number="CAP 0603 X6S 10mkF 10V", Supplier Part Number 1=490-GRM188C81A106KA73DCT-ND, Date Of Revision=22-Nov-24, Item=Cap_28, Packaging="Cut Tape (CT)", Supplier 1=DiGiKey, Supplier 2=JLCPCB, Supplier 3=Kosmodrom, Supplier Part Number 2=C385036, Supplier Part Number 3=00-00073533, Supplier Unit Price 1=0.26, Supplier Unit Price 100=0.0933, Type=SMD
C18 C33: library part Cap_24, "CAP CER 0.1UF ±10% 50V X7R 0402", Manufacturer="Murata Electronics", Manufacturer Part Number=GRM155R71H104KE14J, Operating Temperature="-55°C ~ 125°C", Part Number="CAP 0402 X7R 100nF 50V", Supplier Part Number 1=490-13342-1-ND, Date Of Revision=24-Nov-24, Item=Cap_24, Packaging="Cut Tape (CT)", Supplier 1=DiGiKey, Supplier 2=JLCPCB, Supplier 3=Kosmodrom, Supplier Part Number 2=C2649519, Supplier Part Number 3=00-00069281, Supplier Unit Price 1=0.08, Supplier Unit Price 100=0.0072, Type=SMD
C19 C25 C26: library part Cap_27, "CAP CER 2.2UF ±10% 10V X7R 0603", Manufacturer="Samsung Electro-Mechanics", Manufacturer Part Number=CL10B225KP8NNNC, Operating Temperature="-55°C ~ 125°C", Part Number="CAP 0603 X7R 2.2mkF 10V", Supplier Part Number 1=1276-1134-1-ND, Date Of Revision=19-May-24, Item=Cap_27, Packaging="Cut Tape (CT)", Supplier 1=DiGiKey, Supplier 2=JLCPCB, Supplier 3=Kosmodrom, Supplier Part Number 2=C100082, Supplier Part Number 3=00-00034462, Supplier Unit Price 1=0.1, Supplier Unit Price 100=0.0329, Type=SMD
C23: library part Cap_5, "CAP CER 47PF ±5%  50V C0G/NP0 0402", Manufacturer="Samsung Electro-Mechanics", Manufacturer Part Number=CL05C470JB5NNNC, Operating Temperature="-55°C ~ 125°C", Part Number="CAP 0402 C0G/NP0 47pF 50V", Supplier Part Number 1=1276-1699-1-ND, Date Of Revision=22-Nov-24, Item=Cap_5, Packaging="Cut Tape (CT)", Supplier 1=DiGiKey, Supplier 2=JLCPCB, Supplier 3=Kosmodrom, Supplier Part Number 2=C84706, Supplier Part Number 3=00-00034330, Supplier Unit Price 1=0.1, Supplier Unit Price 100=0.0086, Type=SMD
D1: library part Chip_18, "TSSOP-20-175mil  Microcontrollers (MCU/MPU/SOC) ROHS", Manufacturer="WCH(Jiangsu Qin Heng)", Manufacturer Part Number=CH32V003F4P6, Operating Temperature="-40°C ~ 85°C", Part Number="Analog STM8S003", Date Of Revision=14-Jan-25, Item=Chip_18, Supplier 1=DiGiKey, Supplier 2=JLCPCB, Supplier 3=Kosmodrom, Supplier Part Number 2=CH32V003F4P6, Supplier Part Number 3=00-, Type=SMD
DLed1: library part Led_4, "SMD5050 RGB LEDs(Built-in IC) ROHS", Manufacturer=Worldsemi, Manufacturer Part Number=WS2812B-B/W, Part Number="SMD5050 RGB LED 5x5mm", Date Of Revision=14-Jan-25, Item=Led_4, Supplier 1=DiGiKey, Supplier 2=JLCPCB, Supplier 3=Kosmodrom, Supplier Part Number 2=C114586, Supplier Part Number 3=00-, Type=SMD
GND RX TX: library part WC_1, "Kontrol Point c2.0mm_h1.0mm", Manufacturer Part Number=KP_c2_h1, Date Of Revision=02-May-24, Item=WC_1, Part Number=KP_c2_h1, Supplier 1=DiGiKey, Supplier 2=JLCPCB, Supplier 3=Kosmodrom, Supplier Part Number 3=00-, Type=Thru-hole
J1: library part Conn_38, "5A 1 16P Female Type-C SMD USB Connectors ROHS", Manufacturer="Korean Hroparts Elec", Manufacturer Part Number=TYPE-C-31-M-12, Operating Temperature="-30°C ~ 80°C", Part Number="Conneector USB-Type C 12pin", Date Of Revision=22-Nov-24, Item=Conn_38, Packaging="Cut Tape (CT)", Supplier 1=DiGiKey, Supplier 2=JLCPCB, Supplier 3=IMRAD, Supplier Part Number 2=C165948, Supplier Part Number 3=440808, Type=Thru-hole
J2: library part Conn_21, "CONN HEADER VERT 2POS 2.5MM", Manufacturer="JST Sales America Inc.", Manufacturer Part Number=B2B-XH-A, Operating Temperature="-25°C ~ 85°C", Supplier Part Number 1=455-B2B-XH-A-ND, Date Of Revision=30-Jan-24, Item=Conn_21, Part Number=B2B-XH-A, Supplier 1=DiGiKey, Supplier 2=JLCPCB, Supplier 3=IMRAD, Supplier Part Number 2=C158012, Supplier Part Number 3=407435, Supplier Unit Price 1=0.14, Supplier Unit Price 100=0.0822, Type=Thru-hole
J3 J4: library part Conn_39, "RJ45Receptacle 1 WithLED Plugin Ethernet Connectors / Modular Connectors (RJ45 RJ11) ROHS", Manufacturer="HANRUN(Zhongshan HanRun Elec)", Manufacturer Part Number=HR911105A, Operating Temperature="-0°C ~ 70°C", Part Number="RJ-45 Connector with LED", Date Of Revision=16-Nov-24, Item=Conn_39, Packaging="Cut Tape (CT)", Supplier 1=DiGiKey, Supplier 2=JLCPCB, Supplier 3=Kosmodrom, Supplier Part Number 2=C12074, Supplier Part Number 3=00-00040411, Type=Thru-hole
J5: library part Conn_40, "-20?~+85? 1.6mm Gold Card Slot MicroSD card (TF card) Flip type SMD  SD Card / Memory Card Connector ROHS", Manufacturer="Hanbo Electronic", Manufacturer Part Number=TF-014-H16, Operating Temperature="-20°C ~ 85°C", Part Number="SD-CARD HOLDER", Date Of Revision=16-Nov-24, Item=Conn_40, Packaging="Cut Tape (CT)", Supplier 1=DiGiKey, Supplier 2=JLCPCB, Supplier 3=Kosmodrom, Supplier Part Number 2=C2874208, Supplier Part Number 3=00-, Type=SMD
J6: library part Conn_21, "CONNECTOR FOR FLASH PBS3-2mm", Manufacturer=CONNFLY, Manufacturer Part Number=PBS2-3, Date Of Revision=02-Jan-25, Item=Conn_21, Part Number=PBS2-3, Supplier 1=DiGiKey, Supplier 2=JLCPCB, Supplier 3=Kosmodrom, Supplier Part Number 3=00-00040706, Type=Thru-hole
L1: library part Coil_2, "FERRITE BEAD 220 OHM 0603 1LN", Manufacturer="Murata Electronics", Manufacturer Part Number=BLM18EG221TN1D, Operating Temperature="-55°C ~ 125°C", Part Number="FERRITE BEAD 220 OHM", Supplier Part Number 1=490-5979-1-ND, Date Of Revision=16-Nov-24, Item=Coil_2, Packaging="Cut Tape (CT)", Supplier 1=DiGiKey, Supplier 2=JLCPCB, Supplier 3=IMRAD, Supplier Part Number 2=C113025, Supplier Part Number 3=245775, Supplier Unit Price 1=0.24, Supplier Unit Price 100=0.1161, Type=SMD
L2: library part Coil_13, "3.6A 1.5uH ±20% 5.3A SMD,4x4mm Power Inductors ROHS", Manufacturer="cjiang (Changjiang Microelectronics Tech)", Manufacturer Part Number=FNR4030S1R5MT, Operating Temperature="-40°C ~ 125°C", Part Number="INDUCTOR 1.5uH 3.6A", Date Of Revision=17-Nov-24, Item=Coil_13, Supplier 1=DiGiKey, Supplier 2=JLCPCB, Supplier 3=Kosmodrom, Supplier Part Number 2=C167867, Supplier Part Number 3=00-, Type=SMD
Q1: library part Chip_14, "20V 6A 19m? 1.2V 1 N-Channel SOT-23-6 MOSFETs ROHS", Manufacturer=HL, Manufacturer Part Number=8205, Operating Temperature="-55°C ~ 150°C", Date Of Revision=05-Dec-24, Item=Chip_14, Part Number=8205, Supplier 1=DiGiKey, Supplier 2=JLCPCB, Supplier 3=Kosmodrom, Supplier Part Number 2=C7499847, Supplier Part Number 3=00-, Type=SMD
R1 R9: library part Res_57, "RES 10K OHM 1% 1/16W 0402", Manufacturer=YAGEO, Manufacturer Part Number=RC0402FR-0710KL, Operating Temperature="-55°C ~ 155°C", Part Number="RES 0402 10K 1%", Supplier Part Number 1=311-10.0KLRCT-ND, Date Of Revision=22-Nov-24, Item=Res_57, Packaging="Cut Tape (CT)", Supplier 1=DiGiKey, Supplier 2=JLCPCB, Supplier 3=Kosmodrom, Supplier Part Number 2=C60490, Supplier Part Number 3=00-00071557, Supplier Unit Price 1=0.1, Supplier Unit Price 100=0.0051, Type=SMD
R2 R3 R21 R22 R24: library part Res_6, "RES 0 OHM JUMPER 1/16W 0402", Manufacturer=YAGEO, Manufacturer Part Number=RC0402JR-070RL, Operating Temperature="-55°C ~ 155°C", Part Number="RES 0402 0R", Supplier Part Number 1=311-0.0JRCT-ND, Date Of Revision=22-Nov-24, Item=Res_6, Packaging="Cut Tape (CT)", Supplier 1=DiGiKey, Supplier 2=JLCPCB, Supplier 3=Kosmodrom, Supplier Part Number 2=C60485, Supplier Part Number 3=00-00033680, Supplier Unit Price 1=0.1, Supplier Unit Price 100=0.002, Type=SMD
R4: library part Res_42, "RES 1.5K OHM 1% 1/16W 0402", Manufacturer="Walsin Technology Corporation", Manufacturer Part Number=WR04X1501FTL, Operating Temperature="-55°C ~ 155°C", Part Number="RES 0402 1K5 1%", Supplier Part Number 1=1292-WR04X1501FTLCT-ND, Date Of Revision=24-Nov-24, Item=Res_42, Packaging="Cut Tape (CT)", Supplier 1=DiGiKey, Supplier 2=JLCPCB, Supplier 3=IMRAD, Supplier Part Number 2=C163805, Supplier Part Number 3=463005, Supplier Unit Price 1=0.1, Supplier Unit Price 100=0.0041, Type=SMD
R5: library part Res_116, "RES 100K OHM 1% 1/16W 0402", Manufacturer=YAGEO, Manufacturer Part Number=RC0402FR-07100KL, Operating Temperature="-55°C ~ 155°C", Part Number="RES 0402 100K 1%", Supplier Part Number 1=311-100KLRCT-ND, Date Of Revision=22-Nov-24, Item=Res_116, Packaging="Cut Tape (CT)", Supplier 1=DiGiKey, Supplier 2=JLCPCB, Supplier 3=IMRAD, Supplier Part Number 2=C60490, Supplier Part Number 3=181343, Supplier Unit Price 1=0.1, Supplier Unit Price 100=0.0051, Type=SMD
R6: library part Res_53, "RES 5.1K OHM 1% 1/10W 0402", Manufacturer="KOA Speer Electronics, Inc.", Manufacturer Part Number=RK73H1ETTP5101F, Operating Temperature="-55°C ~ 155°C", Part Number="RES 0402 5K1 1%", Supplier Part Number 1=2019-RK73H1ETTP5101FCT-ND, Date Of Revision=24-Nov-24, Item=Res_53, Packaging="Cut Tape (CT)", Supplier 1=DiGiKey, Supplier 2=JLCPCB, Supplier 3=IMRAD, Supplier Part Number 2=C159990, Supplier Part Number 3=407317, Supplier Unit Price 1=0.1, Supplier Unit Price 100=0.0122, Type=SMD
R7 R8: library part Res_18, "RES 22 OHM 1% 1/16W 0402", Manufacturer="Walsin Technology Corporation", Manufacturer Part Number=WR04X22R0FTL, Operating Temperature="-55°C ~ 155°C", Part Number="RES 0402 22R 1%", Supplier Part Number 1=1292-WR04X22R0FTLTR-ND, Date Of Revision=24-Nov-24, Item=Res_18, Packaging="Cut Tape (CT)", Supplier 1=DiGiKey, Supplier 2=JLCPCB, Supplier 3=Kosmodrom, Supplier Part Number 2=C163821, Supplier Part Number 3=00-00033706, Supplier Unit Price 1=0.1, Supplier Unit Price 100=0.004, Type=SMD
R10: library part Res_80, "RES 5.1K OHM 1% 1/10W 0402", Manufacturer="KOA Speer Electronics, Inc.", Manufacturer Part Number=RK73H1ETTP5101F, Operating Temperature="-55°C ~ 155°C", Part Number="RES 0402 5K1 1%", Supplier Part Number 1=2019-RK73H1ETTP5101FCT-ND, Date Of Revision=24-Nov-24, Item=Res_80, Packaging="Cut Tape (CT)", Supplier 1=DiGiKey, Supplier 2=JLCPCB, Supplier 3=IMRAD, Supplier Part Number 2=C159990, Supplier Part Number 3=407317, Supplier Unit Price 1=0.1, Supplier Unit Price 100=0.0122, Type=SMD
R11 R12 R16 R17 R18: library part Res_25, "RES 47 OHM 5% 1/16W 0402", Manufacturer="Walsin Technology Corporation", Manufacturer Part Number="WR04X470 JTL", Operating Temperature="-55°C ~ 155°C", Part Number="RES 0402 47R 5%", Supplier Part Number 1=1292-WR04X470JTLCT-ND, Date Of Revision=22-Nov-24, Item=Res_25, Packaging="Cut Tape (CT)", Supplier 1=DiGiKey, Supplier 2=JLCPCB, Supplier 3=Kosmodrom, Supplier Part Number 2=C170414, Supplier Part Number 3=00-00033711, Supplier Unit Price 1=0.1, Supplier Unit Price 100=0.0041, Type=SMD
R13 R14 R15: library part Res_21, "RES 47 OHM 5% 1/16W 0402", Manufacturer="Walsin Technology Corporation", Manufacturer Part Number="WR04X470 JTL", Operating Temperature="-55°C ~ 155°C", Part Number="RES 0402 47R 5%", Supplier Part Number 1=1292-WR04X470JTLCT-ND, Date Of Revision=22-Nov-24, Item=Res_21, Packaging="Cut Tape (CT)", Supplier 1=DiGiKey, Supplier 2=JLCPCB, Supplier 3=Kosmodrom, Supplier Part Number 2=C170414, Supplier Part Number 3=00-00033711, Supplier Unit Price 1=0.1, Supplier Unit Price 100=0.0041, Type=SMD
R19 R25 R26 R32: library part Res_73, "RES 100K OHM 1% 1/16W 0402", Manufacturer=YAGEO, Manufacturer Part Number=RC0402FR-07100KL, Operating Temperature="-55°C ~ 155°C", Part Number="RES 0402 100K 1%", Supplier Part Number 1=311-100KLRCT-ND, Date Of Revision=22-Nov-24, Item=Res_73, Packaging="Cut Tape (CT)", Supplier 1=DiGiKey, Supplier 2=JLCPCB, Supplier 3=IMRAD, Supplier Part Number 2=C60490, Supplier Part Number 3=181343, Supplier Unit Price 1=0.1, Supplier Unit Price 100=0.0051, Type=SMD
R20: library part Res_7, "RES 0 OHM JUMPER 1/10W 0603", Manufacturer=YAGEO, Manufacturer Part Number=RC0603JR-070RL, Operating Temperature="-55°C ~ 155°C", Part Number="RES 0603 0R", Supplier Part Number 1=311-0.0GRCT-ND, Date Of Revision=17-Apr-24, Item=Res_7, Packaging="Cut Tape (CT)", Supplier 1=DiGiKey, Supplier 2=JLCPCB, Supplier 3=Kosmodrom, Supplier Part Number 2=C95177, Supplier Part Number 3=00-00033814, Supplier Unit Price 1=0.1, Supplier Unit Price 100=0.006, Type=SMD
R23 R39: library part Res_101, "RES 470K OHM 1% 1/16W 0402", Manufacturer="Walsin Technology Corporation", Manufacturer Part Number=WR04X4703FTL, Operating Temperature="-55°C ~ 155°C", Part Number="RES 0402 470K 1%", Supplier Part Number 1=1292-WR04X4703FTLCT-ND, Date Of Revision=14-Jan-25, Item=Res_101, Packaging="Cut Tape (CT)", Supplier 1=DiGiKey, Supplier 2=JLCPCB, Supplier 3=IMRAD, Supplier Part Number 2=C168230, Supplier Part Number 3=415065, Supplier Unit Price 1=0.1, Supplier Unit Price 100=0.0041, Type=SMD
R27 R29 R30 R46: library part Res_64, "RES 4.7K OHM 1% 1/16W 0402", Manufacturer="Walsin Technology Corporation", Manufacturer Part Number=WR04X4701FTL, Operating Temperature="-55°C ~ 155°C", Part Number="RES 0402 4K7 1%", Supplier Part Number 1=1292-WR04X4701FTLCT-ND, Date Of Revision=17-Jan-25, Item=Res_64, Packaging="Cut Tape (CT)", Supplier 1=DiGiKey, Supplier 2=JLCPCB, Supplier 3=IMRAD, Supplier Part Number 2=C163826, Supplier Part Number 3=463025, Supplier Unit Price 1=0.1, Supplier Unit Price 100=0.004, Type=SMD
R31: library part Res_81, "RES 453K OHM 1% 1/16W 0402", Manufacturer=YAGEO, Manufacturer Part Number=RC0402FR-07453KL, Operating Temperature="-55°C ~ 155°C", Part Number="RES 0402 453K 1%", Supplier Part Number 1=YAG3164CT-ND, Date Of Revision=22-Nov-24, Item=Res_81, Packaging="Cut Tape (CT)", Supplier 1=DiGiKey, Supplier 2=JLCPCB, Supplier 3=IMRAD, Supplier Part Number 2=C137978, Supplier Part Number 3=416063, Supplier Unit Price 1=0.1, Supplier Unit Price 100=0.0051, Type=SMD
R35: library part Res_30, "RES 330 OHM 5% 1/16W 0402", Manufacturer="Walsin Technology Corporation", Manufacturer Part Number="WR04X331 JTL", Operating Temperature="-55°C ~ 155°C", Part Number="RES 0402 330R 5%", Supplier Part Number 1=1292-WR04X331JTLCT-ND, Date Of Revision=22-Nov-24, Item=Res_30, Packaging="Cut Tape (CT)", Supplier 1=DiGiKey, Supplier 2=JLCPCB, Supplier 3=Kosmodrom, Supplier Part Number 2=C168264, Supplier Part Number 3=00-00033727, Supplier Unit Price 1=0.1, Supplier Unit Price 100=0.0041, Type=SMD
R36: library part Res_33, "RES 330 OHM 5% 1/16W 0402", Manufacturer="Walsin Technology Corporation", Manufacturer Part Number="WR04X331 JTL", Operating Temperature="-55°C ~ 155°C", Part Number="RES 0402 330R 5%", Supplier Part Number 1=1292-WR04X331JTLCT-ND, Date Of Revision=22-Nov-24, Item=Res_33, Packaging="Cut Tape (CT)", Supplier 1=DiGiKey, Supplier 2=JLCPCB, Supplier 3=Kosmodrom, Supplier Part Number 2=C168264, Supplier Part Number 3=00-00033727, Supplier Unit Price 1=0.1, Supplier Unit Price 100=0.0041, Type=SMD
R37: library part Res_40, "RES 1K OHM 1% 1/16W 0402", Manufacturer="Walsin Technology Corporation", Manufacturer Part Number=WR04X1001FTL, Operating Temperature="-55°C ~ 155°C", Part Number="RES 0402 1K 1%", Supplier Part Number 1=1292-WR04X1001FTLCT-ND, Date Of Revision=22-Nov-24, Item=Res_40, Packaging="Cut Tape (CT)", Supplier 1=DiGiKey, Supplier 2=JLCPCB, Supplier 3=IMRAD, Supplier Part Number 2=C163815, Supplier Part Number 3=415145, Supplier Unit Price 1=0.1, Supplier Unit Price 100=0.0041, Type=SMD
R38: library part Res_24, "RES 100 OHM 1% 1/16W 0402", Manufacturer="Walsin Technology Corporation", Manufacturer Part Number=WR04X1000FTL, Operating Temperature="-55°C ~ 155°C", Part Number="RES 0402 100R 1%", Supplier Part Number 1=1292-WR04X1000FTLCT-ND, Date Of Revision=05-Dec-24, Item=Res_24, Packaging="Cut Tape (CT)", Supplier 1=DiGiKey, Supplier 2=JLCPCB, Supplier 3=IMRAD, Supplier Part Number 2=C163808, Supplier Part Number 3=462996, Supplier Unit Price 1=0.1, Supplier Unit Price 100=0.004, Type=SMD
R40 R41 R42 R43 R44 R45: library part Res_67, "RES 10K OHM 1% 1/16W 0402", Manufacturer=YAGEO, Manufacturer Part Number=RC0402FR-0710KL, Operating Temperature="-55°C ~ 155°C", Part Number="RES 0402 10K 1%", Supplier Part Number 1=311-10.0KLRCT-ND, Date Of Revision=22-Nov-24, Item=Res_67, Packaging="Cut Tape (CT)", Supplier 1=DiGiKey, Supplier 2=JLCPCB, Supplier 3=Kosmodrom, Supplier Part Number 2=C60490, Supplier Part Number 3=00-00071557, Supplier Unit Price 1=0.1, Supplier Unit Price 100=0.0051, Type=SMD
SIM1: library part Conn_47, "CONN SIM CARD HINGED TYPE R/A", Manufacturer="Amphenol ICC (FCI)", Operating Temperature="-40°C ~ 85°C", Part Number="SIM Card Holder", Supplier Part Number 1=609-1401-1-ND, Date Of Revision=17-Jan-25, Item=Conn_47, Manufacturer Part Number=7111S2015X02LF, Packaging="Cut Tape (CT)", Supplier 1=DiGiKey, Supplier 2=JLCPCB, Supplier 3=IMRAD, Supplier Part Number 2=C598923, Supplier Part Number 3=443681, Supplier Unit Price 1=1.15, Supplier Unit Price 100=0.7633, Type=SMD
SW1: library part SW_8, "Without 50mA 4mm 100M? 100000 Times 12V 160gf 3mm 2mm Round Button Standing paste SPST SMD Tactile Switches ROHS", Manufacturer=XUNPU, Manufacturer Part Number=TS-1088-AR02016, Operating Temperature="-30°C ~ 80°C", Part Number="TACT SWITCH SMD 2.9x4mm", Date Of Revision=26-Nov-24, Item=SW_8, Supplier 1=DiGiKey, Supplier 2=JLCPCB, Supplier 3=Kosmodrom, Supplier Part Number 2=C720477, Supplier Part Number 3=00-, Type=SMD
U1: library part Chip_8, "4V~6V Li-Ion/Polymer 1 1A ESOP-8 Battery Management", Manufacturer=TPOWER, Manufacturer Part Number=TP4056, Operating Temperature="-40°C ~ 85°C", Date Of Revision=02-Aug-24, Item=Chip_8, Part Number=TP4056, Supplier 1=DiGiKey, Supplier 2=JLCPCB, Supplier 3=Kosmodrom, Supplier Part Number 2=C382139, Supplier Part Number 3=00-00061459, Type=SMD
U2: library part Chip_39, "SOP-8  USB2.0 Converter ROHS", Manufacturer="WCH(Jiangsu Qin Heng)", Manufacturer Part Number=CH340N, Operating Temperature="-20°C ~ 70°C", Part Number="USB - UART Converter", Date Of Revision=21-Nov-24, Item=Chip_39, Packaging="Cut Tape (CT)", Supplier 1=DiGiKey, Supplier 2=JLCPCB, Supplier 3=Kosmodrom, Supplier Part Number 2=C2977777, Supplier Part Number 3=00-00064880, Type=SMD
U3: library part Chip_32, "Step-down type 2A 2.7V~5.5V SOT-23-5 DC-DC Converters ROHS", Manufacturer="Silergy Corp", Manufacturer Part Number=SY8089AAAC, Operating Temperature="-40°C ~ 85°C", Part Number="Step-Down DC-DC Controller", Date Of Revision=17-Nov-24, Item=Chip_32, Supplier 1=DiGiKey, Supplier 2=JLCPCB, Supplier 3=Kosmodrom, Supplier Part Number 2=C78988, Supplier Part Number 3=00-, Type=SMD
U4: library part Chip_12, "SOT-23-6 Battery Management ROHS", Manufacturer="Slkor(SLKORMICRO Elec.)", Manufacturer Part Number=DW01A, Operating Temperature="-40°C ~ 85°C", Date Of Revision=05-Dec-24, Item=Chip_12, Part Number=DW01A, Supplier 1=DiGiKey, Supplier 2=JLCPCB, Supplier 3=IMRAD, Supplier Part Number 2=C42380662, Supplier Part Number 3=419926, Type=SMD
VD1 VD2: library part Diode_17, "DIODE SCHOTTKY 30V 1A SOD123", Manufacturer="Nexperia USA Inc.", Manufacturer Part Number=PMEG3010EGWX, Operating Temperature="max ~ 150°C", Part Number="D_SHOTTKY 30V 1A SOD-123", Supplier Part Number 1=1727-7343-1-ND, Date Of Revision=17-Jan-25, Item=Diode_17, Packaging="Cut Tape (CT)", Supplier 1=DiGiKey, Supplier 2=JLCPCB, Supplier 3=Kosmodrom, Supplier Part Number 2=C503429, Supplier Part Number 3=00-, Supplier Unit Price 1=0.17, Supplier Unit Price 100=0.0737, Type=SMD
VD3: library part Diode_24, "DIODE SCHOTTKY 60V 2A DO214AA", Manufacturer="Taiwan Semiconductor Corporation", Manufacturer Part Number=SS26, Operating Temperature="-55°C ~ 150°C", Supplier Part Number 1=1801-SS26CT-ND, Date Of Revision=20-May-24, Item=Diode_24, Packaging="Cut Tape (CT)", Part Number=SS26, Supplier 1=DiGiKey, Supplier 2=JLCPCB, Supplier 3=Kosmodrom, Supplier Part Number 2=C5140018, Supplier Part Number 3=00-00033386, Supplier Unit Price 1=0.41, Supplier Unit Price 100=0.1453, Type=SMD
VT1: library part Tr_7, "20V 3A 23m?@4.5V,3A 800mW 750mV@250uA 1PCSNChannel+1PCSPChannel SOT-23-6  MOSFETs ROHS", Manufacturer="ALLPOWER(ShenZhen Quan Li Semiconductor)", Manufacturer Part Number=AP2003, Operating Temperature="-55°C ~ 150°C", Part Number="2 MOSFET P-CH & N-CH 20V 3A", Date Of Revision=17-Nov-24, Item=Tr_7, Supplier 1=DiGiKey, Supplier 2=JLCPCB, Supplier 3=Kosmodrom, Supplier Part Number 2=C2849575, Supplier Part Number 3=00-, Type=SMD
VT2: library part Tr_21, "MOSFET N-CH 50V 220MA SOT23-3", Manufacturer=onsemi, Manufacturer Part Number=BSS138, Operating Temperature="-55°C ~ 155°C", Part Number="N-CH 50V 220MA SOT23-3", Supplier Part Number 1=BSS138CT-ND, Date Of Revision=10-Mar-25, Item=Tr_21, Packaging="Cut Tape (CT)", Supplier 1=DiGiKey, Supplier 2=JLCPCB, Supplier 3=Kosmodrom, Supplier Part Number 2=C52895, Supplier Part Number 3=00-00031582, Supplier Unit Price 1=0.27, Supplier Unit Price 100=0.0765, Type=SMD
VT3: library part Tr_9, "20V 2A 130m?@4.5V,2A 750mW 950mV@250uA 1 Piece P-Channel SOT-23 MOSFETs ROHS", Manufacturer="ALLPOWER(ShenZhen Quan Li Semiconductor)", Manufacturer Part Number=AP2301B, Operating Temperature="-55°C ~ 150°C", Part Number="MOSFET P-CH 20V 3A SOT23-3", Date Of Revision=17-Nov-24, Item=Tr_9, Supplier 1=DiGiKey, Supplier 2=JLCPCB, Supplier 3=Kosmodrom, Supplier Part Number 2=C2763847, Supplier Part Number 3=00-, Type=SMD
X1: library part Conn_40, "CONN PCI EXP MIN FML 52POS 0.031", Manufacturer="TE Connectivity AMP Connectors", Manufacturer Part Number=1775838-2, Operating Temperature="-55°C ~ 85°C", Part Number="PCI EXP MIN FML Connector", Supplier Part Number 1=A123340CT-ND, Date Of Revision=15-Nov-24, Item=Conn_40, Packaging="Cut Tape (CT)", Supplier 1=DiGiKey, Supplier 2=JLCPCB, Supplier 3=IMRAD, Supplier Part Number 2=C91936, Supplier Part Number 3=263473, Supplier Unit Price 1=1.36, Supplier Unit Price 100=0.8244, Type=SMD
X2: library part Chip_3, "20dBm MT7688AN Chip WiFi Modules", Manufacturer=HI-LINK, Manufacturer Part Number=HLK-7688A, Operating Temperature="-20°C ~ 60°C", Part Number="MT7688AN Chip WiFi Modules", Date Of Revision=16-Nov-24, Item=Chip_3, Supplier 1=DiGiKey, Supplier 2=JLCPCB, Supplier 3=Kosmodrom, Supplier Part Number 2=C209919, Supplier Part Number 3=00-, Type=SMD

## Free pads (board coordinates)
  round 3.5 hole 3.5 unplated: 2(20.2,3)

## Via types
v1: diameter 0.72, hole 0.3, Top Layer to Bottom Layer, tented both sides, 291 vias
v2: diameter 1, hole 0.5, Top Layer to Bottom Layer, tented both sides, 59 vias

## Nets (pads, with @x,y where several pads share a name; then routed paths per layer and width w, separated by ;. In a path a pad name is that pad's centre, name@x,y a point inside that pad or via, vN(x,y) a via of type N, cw(c..) or ccw(c..) an arc to the next point about the centre after c; other vN are vias at no path point)
5G_RST_N: R9.1 R24.1 VT1.1 | length 8.8
  Top Layer w0.21: R24.1@41.55,20.7 42.553,20.7 v1(42.577,20.676) ; VT1.1@41.55,27.575 R9.1@41.55,25.7 41.575,25.675 41.575,25.275 41.875,24.975 v1(42.575,24.975)
  Bottom Layer w0.21: v1(42.575,24.975) 42.577,24.973 v1(42.577,20.676)
C\H\R\G\: D1.2 R11.2 | length 19.4
  Top Layer w0.21: v1(39.502,47.502) 39.502,47.364 39.7,47.166 R11.2@39.7,46.225 ; v1(46.275,47) D1.2@56.75,47
  Bottom Layer w0.21: v1(39.502,47.502) 40.15,48.15 45.125,48.15 v1(46.275,47)
C\L\K\R\E\Q\: X1.7
CH340N_RXD: U2.7 X2.31 | length 13
  Top Layer w0.21: U2.7@18.05,24.56 16.97,24.56 15.49,23.08 15.49,20.82 16.69,19.62 v1(19.57,19.62)
  Bottom Layer w0.21: v1(19.57,19.62) 19.57,19.71 20.76,20.9 X2.31@22,20.9
CH340N_TXD: U2.6 X2.32 | length 7.6
  Top Layer w0.21: U2.6@18.05,23.29 22.65,23.29 v1(23.63,22.31)
  Bottom Layer w0.21: X2.32@22,22.3 23.62,22.3 v1(23.63,22.31)
COEX1: X1.3
COEX2: X1.5